# Altium PCB isokey_left.PcbDoc (part 2 of 5)
Units mm, origin at the board's own origin, x right, y up, seen from the top; angles counter-clockwise.
Board outline 154.06 x 134.15 mm, 2 copper layers (Top Layer, Bottom Layer), stack 1.569 mm thick; 140 components, 88 nets, 412 pads, 257 vias.
Unrouted connection lines stored in the file: 18.
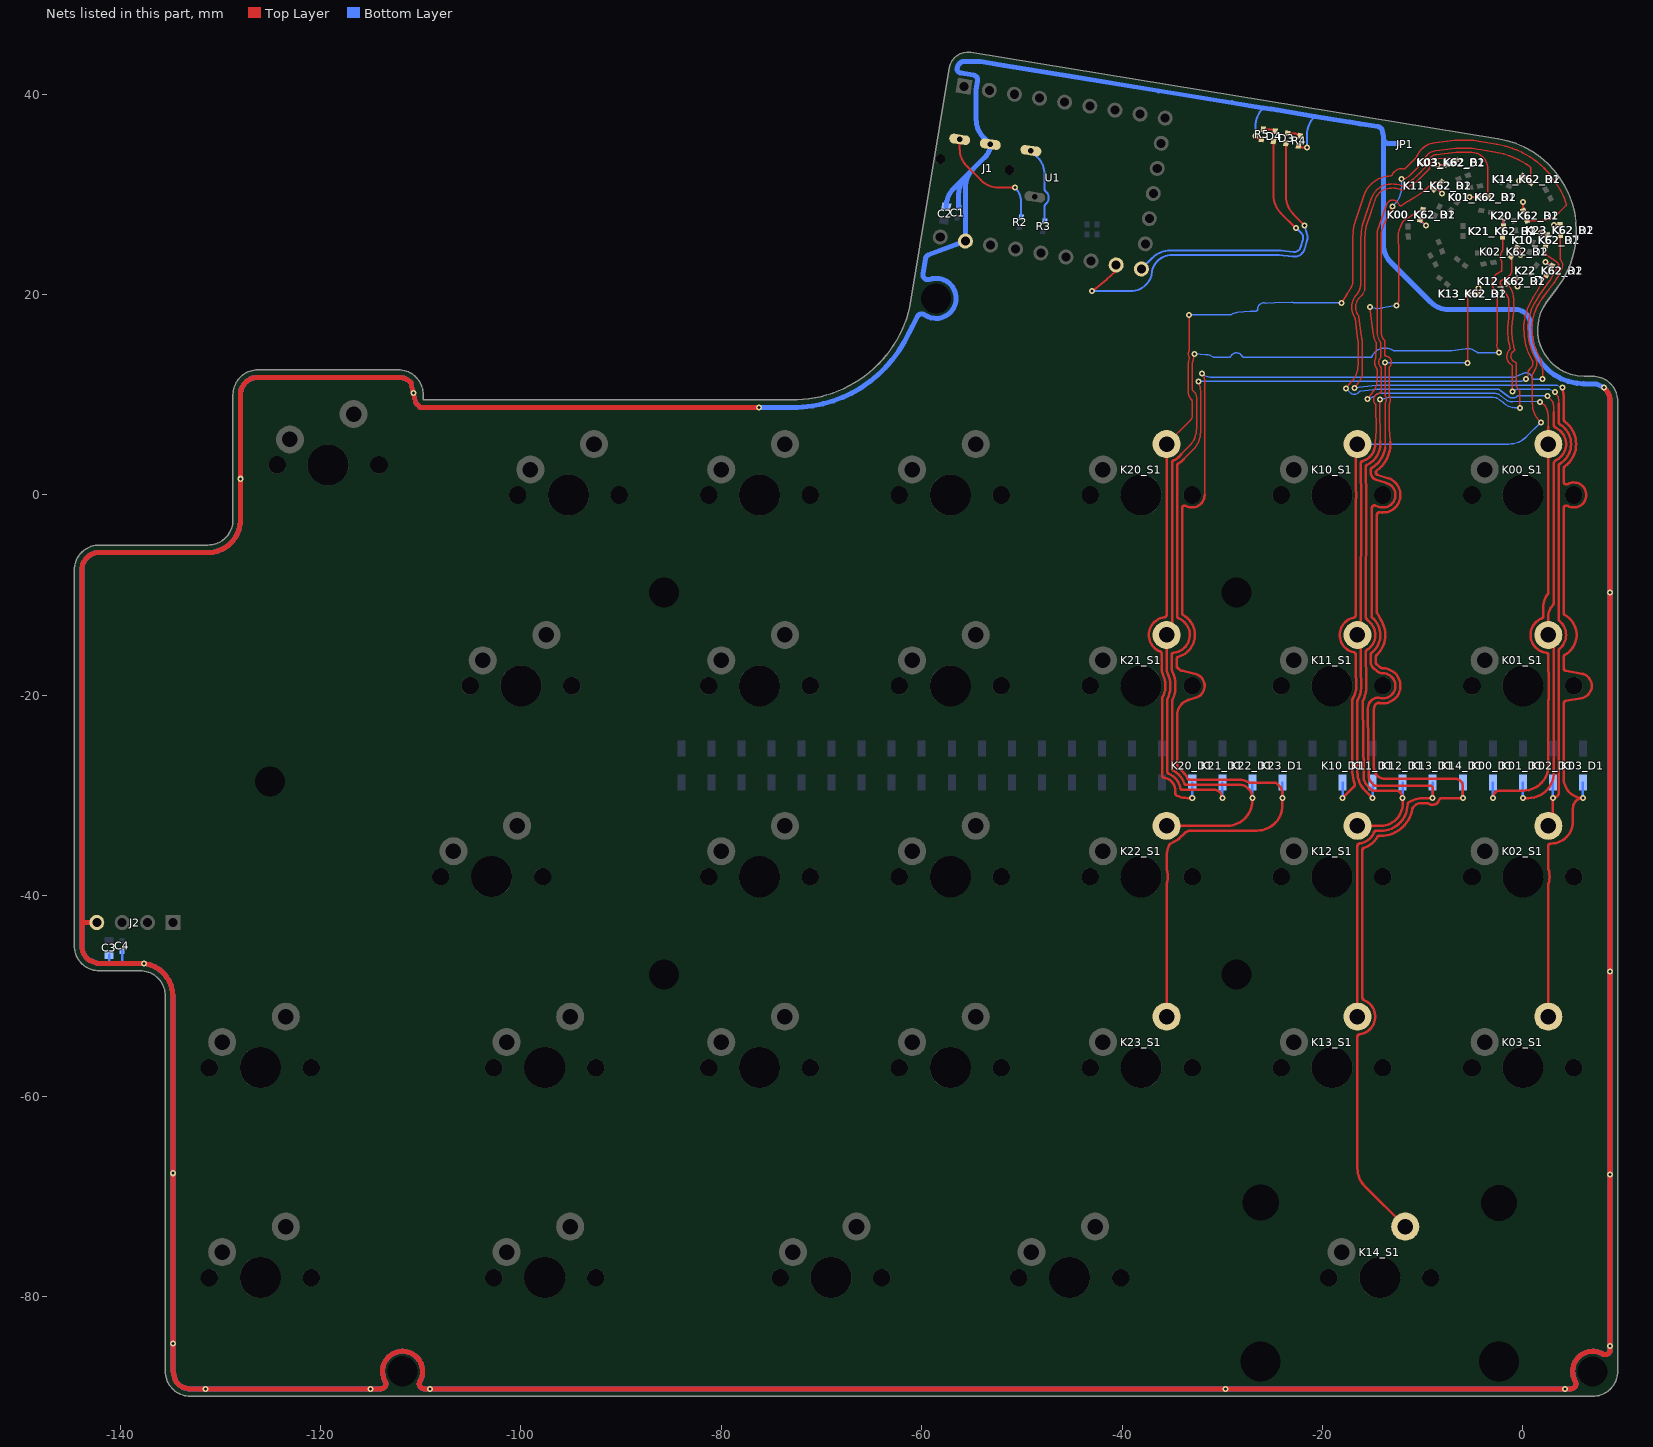
[diagram p2: the nets of this part, all layers, seen from the top]

## Via types
v1: diameter 0.6, hole 0.3, Top Layer to Bottom Layer, 257 vias

## Nets (pads, with @x,y where several pads share a name; then routed paths per layer and width w, separated by ;. In a path a pad name is that pad's centre, name@x,y a point inside that pad or via, vN(x,y) a via of type N, cw(c..) or ccw(c..) an arc to the next point about the centre after c; other vN are vias at no path point) (continued)
GND: C1.1 C2.1 C3.1 C4.1 J1.3 J2.4 JP1.2 R4.1 R5.1 U1.21 | length 1011
  Top Layer w0.2: v1(-26.701,35.827) -26.594,35.72 ccw(c-26.078,36.236) R5.1@-26.078,35.506 ; R4.1@-22.393,34.855 ccw(c-22.024,35.224) -22.024,34.702 v1(-21.551,34.702)
  Top Layer w0.5: -143.838,-42.7 cw(c-143.768,-42.77) -143.768,-42.671 J2.4@-142.339,-42.671 ; v1(-76.259,8.75) -110.061,8.75 -110.5,9.189 -110.997,11.207 -111.178,11.388 -111.381,11.523 ccw(c-111.658,11.108) -111.467,11.57 -111.695,11.664 ccw(c-111.886,11.202) -111.788,11.692 -112.03,11.74 ccw(c-112.127,11.25) -112.127,11.75 -112.25,11.75 -124.499,11.746 -126.368,11.745 ccw(c-126.368,11.245) -126.466,11.735 -126.707,11.687 ccw(c-126.609,11.197) -126.801,11.659 -127.028,11.565 ccw(c-126.837,11.103) -127.115,11.518 -127.319,11.382 ccw(c-127.042,10.966) -127.394,11.32 -127.57,11.144 ccw(c-127.216,10.792) -127.631,11.07 -127.796,10.824 -127.909,10.551 ccw(c-127.447,10.36) -127.937,10.457 -127.988,10.202 ccw(c-127.497,10.105) -127.997,10.116 -128,9.991 ccw(c-127.5,9.982) -128,9.983 -127.996,-1.215 -127.996,-2.46 cw(c-128.496,-2.46) -127.997,-2.488 -128.013,-2.787 cw(c-128.762,-2.745) -128.026,-2.891 -128.122,-3.372 cw(c-128.858,-3.226) -128.165,-3.513 -128.352,-3.965 cw(c-129.045,-3.678) -128.422,-4.095 -128.694,-4.503 cw(c-129.317,-4.086) -128.788,-4.617 -129.133,-4.962 cw(c-129.664,-4.433) -129.247,-5.056 -129.655,-5.328 cw(c-130.072,-4.705) -129.785,-5.398 -130.237,-5.585 cw(c-130.524,-4.892) -130.378,-5.628 -130.859,-5.724 cw(c-131.005,-4.988) -130.968,-5.737 -131.213,-5.749 cw(c-131.25,-5) -131.25,-5.75 -134.028,-5.75 -142.211,-5.75 ccw(c-142.211,-6.25) -142.308,-5.759 -142.55,-5.808 ccw(c-142.452,-6.298) -142.644,-5.836 -142.871,-5.93 ccw(c-142.68,-6.392) -142.958,-5.977 -143.163,-6.113 ccw(c-142.885,-6.529) -143.237,-6.175 -143.413,-6.351 ccw(c-143.059,-6.703) -143.474,-6.425 -143.612,-6.631 ccw(c-143.196,-6.908) -143.657,-6.715 -143.752,-6.944 ccw(c-143.29,-7.135) -143.78,-7.038 -143.838,-7.328 -143.838,-40.2 -143.838,-45.114 ccw(c-143.338,-45.114) -143.828,-45.211 -143.78,-45.453 ccw(c-143.29,-45.355) -143.752,-45.546 -143.657,-45.775 ccw(c-143.196,-45.583) -143.613,-45.858 -143.474,-46.066 ccw(c-143.059,-45.787) -143.414,-46.14 -143.237,-46.316 ccw(c-142.885,-45.961) -143.164,-46.376 -143.101,-46.418 ccw(c-142.824,-46.002) -143.007,-46.467 -142.363,-46.72 -142.26,-46.74 -138,-46.74 cw(c-138,-47.49) -137.963,-46.741 -137.718,-46.753 cw(c-137.755,-47.502) v1(-137.609,-46.767) -137.128,-46.863 cw(c-137.274,-47.598) -136.987,-46.905 -136.534,-47.093 cw(c-136.821,-47.786) -136.405,-47.162 -135.997,-47.434 cw(c-136.414,-48.058) -135.883,-47.529 -135.538,-47.873 cw(c-136.067,-48.404) -135.444,-47.988 -135.172,-48.395 cw(c-135.795,-48.812) -135.102,-48.525 -134.915,-48.978 cw(c-135.608,-49.265) -134.872,-49.118 -134.864,-49.157 -134.776,-49.599 cw(c-135.512,-49.745) -134.763,-49.709 -134.751,-49.954 cw(c-135.5,-49.99) -134.75,-49.99 -134.75,-61.8 -134.75,-87.298 cw(c-135.25,-87.298) -134.75,-87.3 ccw(c-134.25,-87.298) -134.733,-87.427 -134.47,-88.412 -134.386,-88.538 ccw(c-133.971,-88.259) -134.325,-88.612 -134.15,-88.788 ccw(c-133.797,-88.433) -134.076,-88.848 -133.869,-88.986 ccw(c-133.592,-88.57) -133.784,-89.032 -133.555,-89.127 ccw(c-133.365,-88.664) -133.463,-89.155 -133.221,-89.203 ccw(c-133.123,-88.712) -133.123,-89.212 -113.983,-89.212 ccw(c-113.984,-88.712) -113.551,-88.463 cw(c-111.819,-87.462) -110.088,-88.464 ccw(c-109.654,-88.712) -109.656,-89.212 4.806,-89.212 ccw(c4.804,-88.712) 5.238,-88.464 cw(c6.969,-87.462) 5.025,-87.93 cw(c6.969,-87.462) 7.971,-85.731 ccw(c8.219,-85.297) 8.719,-85.299 8.719,9.473 ccw(c8.219,9.473) 8.71,9.571 8.662,9.812 ccw(c8.171,9.715) 8.633,9.906 8.539,10.133 ccw(c8.077,9.942) 8.493,10.22 8.356,10.425 ccw(c7.94,10.147) 8.294,10.5 v1(8.085,10.709) v1@8.044,10.737
  Bottom Layer w0.2: v1(-26.701,35.827) -26.701,36.79 cw(c-24.161,36.79) -25.957,38.586 -25.907,38.636 ; v1(-21.551,34.702) -21.551,35.948 cw(c-19.011,35.948) -20.807,37.744 -20.756,37.795
  Bottom Layer w0.25: -141.1,-46.74 C3.1@-141.1,-45.911 ; -139.799,-46.74 C4.1@-139.799,-45.5
  Bottom Layer w0.5: -143.838,-42.7 cw(c-143.768,-42.77) -143.768,-42.671 J2.4@-142.339,-42.671 ; -65.72,10.934 cw(c-66.012,11.34) -65.734,10.924 -65.972,10.766 ; -65.189,11.316 ccw(c-65.627,11.925) -65.15,11.346 ; -63.601,12.738 cw(c-64.166,13.231) -63.644,12.693 -64.348,12.01 cw(c-64.87,12.548) -64.393,11.969 -64.819,11.618 -65.15,11.346 ; -63.601,12.738 -63.368,13.005 -62.956,13.476 ccw(c-63.521,13.969) -62.918,13.524 -62.335,14.312 ccw(c-62.938,14.758) -62.3,14.363 -61.883,15.035 -61.783,15.196 ccw(c-62.421,15.592) -61.753,15.25 -61.306,16.123 -60.961,16.798 -60.446,17.803 cw(c-60.001,17.575) -59.716,17.986 ccw(c-58.572,19.627) -59.222,21.518 cw(c-59.383,21.991) -59.876,22.074 -59.626,23.586 cw(c-59.133,23.504) -59.308,23.973 U1.21@-55.644,25.341 -55.644,30.702 cw(c-53.104,30.702) -54.9,32.498 ; C2.1@-57.555,28.784 -57.555,28.79 cw(c-55.015,28.79) -56.811,30.587 -55.563,31.835 ; C1.1@-56.307,28.661 -56.307,30.039 cw(c-53.767,30.039) -55.563,31.835 ; -17.276,37.227 -16.414,37.086 ; -16.205,37.052 -16.414,37.086 ; JP1.2@-12.293,35.086 -13.419,35.086 cw(c-13.419,35.577) -13.91,35.577 ; 1.452,13.783 1.145,14.396 cw(c1.816,14.732) 1.103,14.499 0.89,15.15 cw(c1.602,15.384) 0.863,15.258 0.789,15.69 0.748,15.935 cw(c1.487,16.06) 0.738,16.044 0.723,16.729 cw(c1.473,16.745) 0.729,16.841 0.751,17.017 ccw(c-0.742,17.017) -0.742,18.51 -7.421,18.51 cw(c-7.421,21.05) -9.217,19.254 -13.166,23.203 cw(c-11.37,24.999) -13.91,24.999 -13.91,35.577 ; 1.452,13.783 ccw(c2.122,14.119) 1.508,13.688 1.6,13.558 1.902,13.127 ccw(c2.516,13.557) 1.972,13.041 2.444,12.544 ccw(c2.988,13.06) 2.526,12.469 3.066,12.047 ccw(c3.528,12.637) 3.157,11.985 3.754,11.646 ccw(c4.124,12.298) 3.854,11.599 4.493,11.352 ccw(c4.764,12.051) 4.599,11.319 5.268,11.169 ; 5.331,11.157 cw(c5.433,11.901) 5.268,11.169 ; 6.284,11.099 ccw(c6.25,10.6) 6.25,11.1 6.116,11.1 cw(c6.116,11.85) 6.061,11.102 5.377,11.153 cw(c5.433,11.901) 5.268,11.169 ; 6.284,11.1 7.292,11.064 cw(c7.274,10.564) 7.372,11.054 7.438,11.041 v1@7.934,10.792 ; -65.972,10.766 -65.196,11.311 ccw(c-65.627,11.925) -65.15,11.346 ; -65.972,10.766 -66.198,10.615 -66.843,10.251 -67.007,10.163 cw(c-67.245,10.603) -67.021,10.155 cw(c-67.245,10.603) -67.035,10.149 -67.853,9.771 cw(c-68.167,10.453) -67.902,9.751 -68.819,9.404 cw(c-69.084,10.105) -68.877,9.385 -69.82,9.114 cw(c-70.027,9.834) -69.879,9.099 -70.841,8.906 cw(c-70.988,9.641) -70.901,8.896 -71.875,8.782 cw(c-71.963,9.527) -71.921,8.778 -72.411,8.751 cw(c-72.452,9.5) -72.452,8.75 v1(-76.259,8.75) -110.061,8.75 -110.5,9.189 -110.997,11.207 -111.178,11.388 -111.381,11.523 ccw(c-111.658,11.108) -111.467,11.57 -111.695,11.664 ccw(c-111.886,11.202) -111.788,11.692 -112.03,11.74 ccw(c-112.127,11.25) -112.127,11.75 -112.25,11.75 -124.499,11.746 -126.368,11.745 ccw(c-126.368,11.245) -126.466,11.735 -126.707,11.687 ccw(c-126.609,11.197) -126.801,11.659 -127.028,11.565 ccw(c-126.837,11.103) -127.115,11.518 -127.319,11.382 ccw(c-127.042,10.966) -127.394,11.32 -127.57,11.144 ccw(c-127.216,10.792) -127.631,11.07 -127.796,10.824 -127.909,10.551 ccw(c-127.447,10.36) -127.937,10.457 -127.988,10.202 ccw(c-127.497,10.105) -127.997,10.116 -128,9.991 ccw(c-127.5,9.982) -128,9.983 -127.996,-1.215 -127.996,-2.46 cw(c-128.496,-2.46) -127.997,-2.488 -128.013,-2.787 cw(c-128.762,-2.745) -128.026,-2.891 -128.122,-3.372 cw(c-128.858,-3.226) -128.165,-3.513 -128.352,-3.965 cw(c-129.045,-3.678) -128.422,-4.095 -128.694,-4.503 cw(c-129.317,-4.086) -128.788,-4.617 -129.133,-4.962 cw(c-129.664,-4.433) -129.247,-5.056 -129.655,-5.328 cw(c-130.072,-4.705) -129.785,-5.398 -130.237,-5.585 cw(c-130.524,-4.892) -130.378,-5.628 -130.859,-5.724 cw(c-131.005,-4.988) -130.968,-5.737 -131.213,-5.749 cw(c-131.25,-5) -131.25,-5.75 -134.028,-5.75 -142.211,-5.75 ccw(c-142.211,-6.25) -142.308,-5.759 -142.55,-5.808 ccw(c-142.452,-6.298) -142.644,-5.836 -142.871,-5.93 ccw(c-142.68,-6.392) -142.958,-5.977 -143.163,-6.113 ccw(c-142.885,-6.529) -143.237,-6.175 -143.413,-6.351 ccw(c-143.059,-6.703) -143.474,-6.425 -143.612,-6.631 ccw(c-143.196,-6.908) -143.657,-6.715 -143.752,-6.944 ccw(c-143.29,-7.135) -143.78,-7.038 -143.838,-7.328 -143.838,-40.2 -143.838,-45.114 ccw(c-143.338,-45.114) -143.828,-45.211 -143.78,-45.453 ccw(c-143.29,-45.355) -143.752,-45.546 -143.657,-45.775 ccw(c-143.196,-45.583) -143.613,-45.858 -143.474,-46.066 ccw(c-143.059,-45.787) -143.414,-46.14 -143.237,-46.316 ccw(c-142.885,-45.961) -143.164,-46.376 -143.101,-46.418 ccw(c-142.824,-46.002) -143.007,-46.467 -142.363,-46.72 -142.26,-46.74 -141.1,-46.74 -139.799,-46.74 -138,-46.74 cw(c-138,-47.49) -137.963,-46.741 -137.718,-46.753 cw(c-137.755,-47.502) v1(-137.609,-46.767) -137.128,-46.863 cw(c-137.274,-47.598) -136.987,-46.905 -136.534,-47.093 cw(c-136.821,-47.786) -136.405,-47.162 -135.997,-47.434 cw(c-136.414,-48.058) -135.883,-47.529 -135.538,-47.873 cw(c-136.067,-48.404) -135.444,-47.988 -135.172,-48.395 cw(c-135.795,-48.812) -135.102,-48.525 -134.915,-48.978 cw(c-135.608,-49.265) -134.872,-49.118 -134.864,-49.157 -134.776,-49.599 cw(c-135.512,-49.745) -134.763,-49.709 -134.751,-49.954 cw(c-135.5,-49.99) -134.75,-49.99 -134.75,-61.8 -134.75,-87.298 cw(c-135.25,-87.298) -134.75,-87.3 ccw(c-134.25,-87.298) -134.733,-87.427 -134.47,-88.412 -134.386,-88.538 ccw(c-133.971,-88.259) -134.325,-88.612 -134.15,-88.788 ccw(c-133.797,-88.433) -134.076,-88.848 -133.869,-88.986 ccw(c-133.592,-88.57) -133.784,-89.032 -133.555,-89.127 ccw(c-133.365,-88.664) -133.463,-89.155 -133.221,-89.203 ccw(c-133.123,-88.712) -133.123,-89.212 -113.983,-89.212 ccw(c-113.984,-88.712) -113.551,-88.463 cw(c-111.819,-87.462) -110.088,-88.464 ccw(c-109.654,-88.712) -109.656,-89.212 4.806,-89.212 ccw(c4.804,-88.712) 5.238,-88.464 cw(c6.969,-87.462) 5.025,-87.93 cw(c6.969,-87.462) 7.971,-85.731 ccw(c8.219,-85.297) 8.719,-85.299 8.719,9.473 ccw(c8.219,9.473) 8.71,9.571 8.662,9.812 ccw(c8.171,9.715) 8.633,9.906 8.539,10.133 ccw(c8.077,9.942) 8.493,10.22 8.356,10.425 ccw(c7.94,10.147) 8.294,10.5 v1(8.085,10.709) v1@8.044,10.737 ; -55.563,31.835 -54.9,32.498 ; -54.9,32.498 -53.698,33.699 ccw(c-55.01,35.011) J1.3@-53.155,35.011 -53.822,35.679 cw(c-52.026,37.475) -54.566,37.475 -54.566,40.394 -54.417,41.336 ccw(c-54.91,41.415) -54.832,41.908 -56.051,42.101 cw(c-55.971,42.595) -56.177,42.139 -56.212,42.155 cw(c-56.006,42.611) -56.496,42.512 -56.452,42.68 cw(c-55.969,42.55) -56.417,42.771 -56.366,42.875 cw(c-55.917,42.654) -56.314,42.959 -56.243,43.051 cw(c-55.847,42.747) -56.176,43.122 -56.173,43.125 cw(c-55.843,42.75) -55.843,43.25 -54.195,43.25 cw(c-54.195,42.75) -54.114,43.243 -51.78,42.862 -45.322,41.807 -36.366,40.345 -29.054,39.15 -25.948,38.643 -25.907,38.636 -25.189,38.519 -25.091,38.503 -24.504,38.407 -20.756,37.795 -16.414,37.086 ; -16.414,37.086 -14.452,36.765 cw(c-14.532,36.272) -14.062,36.443 cw(c-16.45,35.577) -13.91,35.577 ; v1@7.934,10.792 cw(c7.766,10.321) v1@8.044,10.737 ; v1@7.934,10.792 v1@8.044,10.737
  other v1: -131.475,-89.212 -115.004,-89.212 -109.063,-89.212 -29.659,-89.212 4.201,-89.212 8.719,-84.928 -134.75,-84.681 8.719,-67.825 -134.75,-67.697 8.719,-47.577 8.719,-9.723 -127.997,1.62 -110.749,10.198
LED0: D3.2 U1.15 | length 38.4
  Top Layer w0.2: v1(-42.99,20.34) -41.535,21.507 ccw(c-41.66,21.663) -41.522,21.519 -41.145,21.879 -40.653,22.349 ccw(c-40.791,22.494) -40.591,22.494 U1.15@-40.591,22.957 ; D3.2@-23.643,35.105 -23.643,29.813 ccw(c-21.103,29.813) -22.899,28.017 v1(-21.803,26.921)
  Bottom Layer w0.2: v1(-42.99,20.34) -39.162,20.34 ccw(c-39.162,22.518) -37.079,21.879 -36.997,22.383 ccw(c-38.083,22.56) -36.997,22.386 -36.973,22.527 cw(c-36.776,22.495) -36.966,22.559 cw(c-34.988,21.879) -34.988,23.97 -24.381,23.97 cw(c-24.381,23.77) -24.356,23.969 -22.963,23.797 ccw(c-22.828,24.889) -22.154,24.02 ccw(c-22.828,24.889) -21.804,24.488 ccw(c-22.222,24.655) -21.803,24.491 ccw(c-22.828,24.889) -21.774,24.575 ; v1(-21.803,26.921) -21.533,26.026 cw(c-22.585,25.706) -21.531,25.393 ; -21.774,24.575 -21.531,25.392
LED1: D4.2 U1.14 | length 28.5
  Top Layer w0.2: D4.2@-24.893,35.318 -24.893,29.929 ccw(c-22.353,29.929) -24.149,28.133 v1(-22.666,26.65)
  Bottom Layer w0.2: U1.14@-38.083,22.56 -36.966,23.676 cw(c-35.17,21.88) -35.17,24.42 -24.191,24.42 cw(c-24.191,24.22) -24.163,24.418 -22.918,24.245 ccw(c-22.828,24.889) -22.222,24.654 ; v1(-22.666,26.65) -22.154,26.192 cw(c-22.585,25.706) -21.941,25.795 cw(c-22.585,25.706) -21.962,25.521 -22.205,24.704 cw(c-22.828,24.889) -22.222,24.655
NetD3_1: D3.1 R4.2 | length 1.3
  Top Layer w0.2: D3.1@-23.486,36.092 -22.84,36.092 cw(c-22.84,35.239) R4.2@-22.236,35.842
NetD4_1: D4.1 R5.2 | length 1.2
  Top Layer w0.2: R5.2@-25.922,36.494 -25.191,36.494 cw(c-25.191,35.851) D4.1@-24.736,36.306
NetJ1_2: J1.2 R2.2 | length 11.6
  Top Layer w0.2: J1.2@-56.216,35.496 -56.216,34.584 ccw(c-53.676,34.584) -55.473,32.788 -54.13,31.446 ccw(c-52.334,33.242) -52.334,30.702 v1(-50.688,30.702)
  Bottom Layer w0.2: v1(-50.688,30.702) cw(c-52.174,29.216) -50.072,29.216 R2.2@-50.072,27.717
NetJ1_4: J1.4 R3.2 | length 7.8
  Bottom Layer w0.2: J1.4@-49.105,34.37 -48.47,33.735 cw(c-50.266,31.939) -47.726,31.939 -47.726,30.488 ccw(c-47.526,30.489) -47.651,30.333 cw(c-48.179,29.667) -47.651,29.001 ccw(c-47.526,28.845) -47.726,28.846 R3.2@-47.726,27.315
NetK00_D1_2: K00_D1.2 K00_K62_D2.2 K00_S1.2 | length 87.8
  Top Layer w0.15: v1(-15.502,9.574) -15.145,10.062 cw(c-15.024,9.973) -15.143,10.065 -15.08,10.146 cw(c-14.27,9.517) -14.97,10.266 ccw(c-16.335,11.401) -14.56,11.401 -14.56,11.758 ; v1(-15.268,18.742) -14.946,16.046 ccw(c-12.943,16.285) -14.657,15.221 cw(c-14.784,15.142) -14.634,15.14 ; -14.634,15.139 -14.662,13.764 cw(c-14.812,13.767) -14.678,13.7 ccw(c-13.76,13.244) -14.589,12.641 cw(c-14.71,12.553) -14.56,12.553 -14.56,11.761 ; v1(-12.636,18.935) -12.437,19.226 ccw(c-12.561,19.311) -12.411,19.311 -12.411,23.96 -12.42,26.08 cw(c-11.695,26.084) -12.366,26.359 -12.319,26.475 -12.019,27.207 cw(c-11.719,27.084) -11.902,27.352 -10.774,28.123 cw(c-10.689,28) -10.727,28.145 -10.21,28.278 K00_K62_D2.2@-9.983,28.45 ; v1(1.728,9.292) 2.167,8.971 cw(c2.078,8.85) 2.208,8.925 cw(c0,7.669) 2.209,8.923 cw(c0,7.669) 2.54,7.669 2.54,6.799
  Top Layer w0.25: v1(-3,-30.25) cw(c-2.25,-30.25) -2.25,-29.5 0.071,-29.5 ccw(c0.071,-27.031) 2.54,-27.031 2.54,-20.504 cw(c2.79,-20.505) 2.563,-20.401 ccw(c2.335,-20.298) 2.585,-20.298 2.585,-17.802 ccw(c2.335,-17.802) 2.563,-17.699 cw(c2.79,-17.595) 2.54,-17.596 2.54,-15.978 ccw(c2.29,-15.98) 2.321,-15.731 cw(c2.54,-13.97) 1.883,-12.321 1.884,-12.321 ccw(c1.79,-12.089) 2.04,-12.09 2.04,-11.26 cw(c4.403,-11.26) 2.492,-9.87 ccw(c2.29,-9.723) 2.54,-9.723 K00_S1.2@2.54,5.08 2.54,6.799
  Bottom Layer w0.15: v1(-15.502,9.574) -14.954,9.808 ccw(c-15.014,9.946) -14.929,9.822 -14.625,10.032 cw(c-14.27,9.517) -14.27,10.142 -2.942,10.142 cw(c-2.942,8.664) -2.417,10.046 cw(c-2.471,9.906) -2.382,10.027 -1.766,9.579 -1.642,9.488 ccw(c-1.407,9.812) -1.641,9.488 ccw(c-1.039,10.317) -1.375,9.349 ccw(c-1.039,10.317) -1.017,9.292 1.587,9.349 cw(c1.59,9.199) 1.59,9.349 cw(c1.59,9.155) v1(1.728,9.292) ; v1(-15.268,18.742) -14.736,18.621 ccw(c-14.614,19.158) -14.541,18.613 ccw(c-14.594,19.009) -14.539,18.613 cw(c-13.76,13.244) -14.054,18.661 ccw(c-14.074,19.061) -14.052,18.661 ccw(c-14.074,19.061) -14.046,18.662 ccw(c-14.084,19.21) -13.977,18.671 v1(-12.636,18.935)
  Bottom Layer w0.25: v1(-3,-30.25) K00_D1.2@-3,-28.7
NetK00_K62_D2_1: K00_K62_D2.1 K00_K62_R1.2 | length 1.6
  Top Layer w0.15: K00_K62_D2.1@-10.242,27.485 v1(-9.679,26.921)
  Bottom Layer w0.15: K00_K62_R1.2@-10.242,27.485 -10.131,27.222 v1(-9.679,26.921)
NetK01_D1_2: K01_D1.2 K01_K62_D2.2 K01_S1.2 | length 107.7
  Top Layer w0.15: v1(-17.675,10.619) -17.317,11.07 cw(c-16.827,10.681) -17.244,11.147 -17.205,11.183 ccw(c-17.305,11.294) -17.198,11.189 ccw(c-18.994,12.985) -16.454,12.985 -16.454,13.342 ; -16.534,15.85 ccw(c-12.943,16.285) -16.533,15.847 -16.455,15.206 cw(c-16.604,15.188) -16.454,15.188 -16.454,13.345 ; -16.534,15.851 -16.755,17.653 ccw(c-16.904,17.635) -16.779,17.718 cw(c-15.268,18.742) -16.794,19.743 cw(c-15.268,18.742) -16.546,20.045 ccw(c-16.652,20.151) -16.528,20.067 ccw(c-18.322,21.271) -16.161,21.271 -16.161,25.271 -16.16,25.767 ; -16.16,25.768 cw(c-11.62,25.758) -16.145,26.122 cw(c-11.62,25.758) -16.133,26.257 cw(c-11.62,25.758) -15.928,27.192 -15.132,29.582 cw(c-13.112,28.91) -15.129,29.589 ; -10.564,31.882 -10.927,31.532 cw(c-11.031,31.639) -10.953,31.512 -11.981,30.876 cw(c-12.06,31.003) -12.118,30.865 ccw(c-12.99,28.818) -13.07,31.041 -13.182,31.037 ccw(c-13.112,28.91) -13.435,31.014 ; -10.563,31.883 -10.352,32.087 ccw(c-10.456,32.195) -10.351,32.088 -9.76,32.679 -9.465,33.358 cw(c-8.524,32.951) -8.641,33.969 -6.639,34.199 cw(c-6.621,34.05) -6.621,34.2 -5.129,34.2 -4.622,34.117 cw(c-4.647,33.969) -4.598,34.111 cw(c-5.129,32.57) -3.499,32.57 K01_K62_D2.2@-3.499,29.726 ; v1(2.453,9.899) 2.849,9.467 cw(c2.739,9.366) 2.858,9.457 cw(c2.045,8.836) 2.859,9.456 cw(c2.045,8.836) 3.068,8.836 3.068,8.258 ; -15.129,29.589 cw(c-13.112,28.91) -13.435,31.014 ; -15.129,29.589 cw(c-13.112,28.91) -13.435,31.014 ; -15.129,29.589 cw(c-13.112,28.91) -13.435,31.014
  Top Layer w0.25: v1(0,-30.25) 0.546,-30.25 ccw(c0.546,-27.71) 3.086,-27.71 3.086,-22.754 ccw(c2.836,-22.754) 3.086,-22.753 cw(c3.586,-22.75) 3.086,-22.75 3.086,-16.469 cw(c3.586,-16.469) 3.086,-16.466 K01_S1.2@3.086,-13.97 ; K01_S1.2@2.54,-13.97 2.54,-12.111 cw(c4.111,-12.111) 3,-11 ccw(c2.793,-10.793) 3.086,-10.793 3.086,3.219 3.197,3.387 3.268,3.447 3.377,3.515 ccw(c2.54,5.08) 3.377,6.645 3.267,6.713 3.196,6.773 3.086,6.939 3.068,8.258
  Bottom Layer w0.15: v1(-17.675,10.619) -17.255,10.225 ccw(c-16.827,10.681) -16.338,10.292 cw(c-16.222,10.198) -16.238,10.347 -14.568,10.541 cw(c-14.551,10.392) -14.551,10.542 -13.761,10.542 ; -13.76,10.542 -2.358,10.542 -2.226,10.41 ccw(c-2.12,10.516) -2.208,10.395 -1.407,9.812 ccw(c-1.039,10.317) -0.842,9.724 -0.691,9.774 cw(c-0.345,9.428) -0.345,9.917 1.853,9.917 cw(c1.853,9.767) 1.857,9.917 v1(2.453,9.899)
  Bottom Layer w0.25: v1(0,-30.25) K01_D1.2@0,-28.7
NetK01_K62_D2_1: K01_K62_D2.1 K01_K62_R1.2 | length 1.6
  Top Layer w0.15: v1(-5.315,29.726) K01_K62_D2.1@-4.499,29.726
  Bottom Layer w0.15: v1(-5.315,29.726) K01_K62_R1.2@-4.499,29.726
NetK02_D1_2: K02_D1.2 K02_K62_D2.2 K02_S1.2 | length 65.6
  Top Layer w0.15: -1.973,20.566 -1.475,19.721 cw(c-1.604,19.645) -1.46,19.686 cw(c-3.384,19.154) -1.388,19.154 -1.388,17.859 cw(c-1.538,17.859) -1.389,17.841 -1.478,17.12 ccw(c-1.082,17.07) -1.479,17.119 ; -1.973,20.567 -2.223,21 cw(c-1.942,21.162) -2.251,21.063 cw(c-1.942,21.162) -2.104,21.444 -2.099,21.447 -1.844,21.594 -1.583,21.745 -1.54,21.769 ccw(c-1.74,22.116) -1.528,21.776 -1.382,21.867 ccw(c-1.671,22.335) -1.121,22.335 -1.121,23.287 ccw(c-1.521,23.287) -1.122,23.318 -1.14,23.568 K02_K62_D2.2@-1.161,23.851 ; -1.501,16.682 -1.487,15.997 ; -1.501,16.684 cw(c0.898,16.733) -1.502,16.688 cw(c1.473,16.745) -1.479,17.115 cw(c0.506,16.868) -1.479,17.116 ; -1.487,15.993 ccw(c1.487,16.06) -1.446,15.565 ccw(c0.132,15.829) -1.446,15.563 ccw(c-0.657,15.694) -1.446,15.561 -1.388,15.223 ccw(c-0.994,15.289) -1.388,15.222 -1.33,14.884 ccw(c-0.936,14.951) -1.33,14.883 ; -1.329,14.879 ccw(c1.602,15.384) -1.286,14.673 cw(c-1.432,14.637) -1.322,14.536 ccw(c-0.572,13.836) -1.152,12.991 -1.117,12.967 cw(c-1.202,12.843) -1.052,12.844 -1.052,10.349 ccw(c-1.007,10.349) v1(-1.039,10.317) ; v1(3.203,10.299) 3.51,9.829 cw(c3.384,9.747) 3.531,9.78 cw(c2.463,9.544) 3.531,9.778 cw(c2.463,9.544) 3.556,9.544 3.556,9.113
  Top Layer w0.25: K02_S1.2@2.784,-33.02 ccw(c2.262,-32.498) 3,-32.498 v1(3,-30.25) ccw(c3,-29.664) 3.586,-29.664 3.586,-22.75 3.586,-15.525 cw(c3.836,-15.526) 3.675,-15.335 ccw(c2.54,-13.97) 3.675,-12.605 cw(c3.836,-12.414) 3.586,-12.415 3.586,2.914 cw(c3.836,2.913) 3.707,3.127 ccw(c2.54,5.08) 3.706,7.033 cw(c3.836,7.247) 3.586,7.246 3.586,8.248 ; 3.556,9.113 3.571,8.682 ; 3.571,8.681 3.585,8.249
  Bottom Layer w0.15: v1(-1.039,10.317) cw(c-0.496,9.774) -0.496,10.542 2.627,10.542 cw(c2.627,10.392) 2.688,10.529 v1(3.203,10.299)
  Bottom Layer w0.25: v1(3,-30.25) K02_D1.2@3,-28.7
NetK02_K62_D2_1: K02_K62_D2.1 K02_K62_R1.2 | length 1.8
  Top Layer w0.15: K02_K62_D2.1@-0.609,24.685 -0.269,24.345 -0.269,23.992 v1(-0.237,23.96)
  Bottom Layer w0.15: K02_K62_R1.2@-0.613,24.684 -0.272,24.343 -0.272,23.995 v1(-0.237,23.96)
NetK03_D1_2: K03_D1.2 K03_K62_D2.2 K03_S1.2 | length 127.2
  Top Layer w0.15: v1(-16.827,10.681) -16.798,10.711 ccw(c-16.904,10.816) -16.783,10.728 -16.16,11.58 ccw(c-16.604,11.905) -16.054,11.901 ccw(c-16.454,11.904) -16.054,11.904 -16.054,14.722 -16.054,15.447 ccw(c-16.204,15.447) -16.059,15.484 cw(c-12.943,16.285) -16.137,15.899 ; -16.137,15.9 -16.369,17.801 ccw(c-16.518,17.783) -16.399,17.874 cw(c-15.268,18.742) -16.11,19.891 -16.09,19.91 ccw(c-16.462,20.315) -15.959,20.093 -15.808,20.435 ccw(c-16.311,20.657) -15.761,20.654 ccw(c-16.161,20.656) -15.761,20.656 -15.761,25.27 -15.76,25.766 ; -15.76,25.767 cw(c-11.62,25.758) -15.735,26.209 cw(c-11.62,25.758) -15.522,27.142 ; -15.521,27.144 -15.218,27.999 -14.759,29.435 cw(c-13.112,28.91) -13.112,30.638 cw(c-12.99,28.818) -12.81,30.634 cw(c-12.99,28.818) -12.108,30.415 ccw(c-12.037,30.547) -11.958,30.419 -11.305,30.823 -10.705,31.195 ccw(c-10.784,31.322) -10.68,31.214 -10.286,31.594 ; -10.286,31.595 -10.071,31.803 -9.386,32.487 ccw(c-9.493,32.593) -9.353,32.538 -9.13,33.105 cw(c-8.524,32.951) -8.554,33.575 -7.439,33.656 cw(c-7.414,33.332) -7.363,33.653 -6.886,33.577 ccw(c-6.862,33.725) -6.862,33.575 cw(c-6.862,33.385) K03_K62_D2.2@-6.672,33.385
  Top Layer w0.25: K03_S1.2@2.54,-52.07 2.54,-38.919 cw(c2.79,-38.921) 2.552,-38.845 ccw(c0.244,-38.1) 2.552,-37.355 cw(c2.79,-37.279) 2.54,-37.281 2.54,-35.044 cw(c2.79,-35.045) 2.789,-34.795 ccw(c2.789,-32.584) 5,-32.584 5,-31.25 cw(c6,-31.25) v1(6,-30.25) cw(c6,-28.336) 4.086,-28.336 4.086,-20.801 cw(c4.336,-20.801) 4.292,-20.555 5.843,-20.281 ccw(c5.626,-19.05) 5.843,-17.819 4.292,-17.545 cw(c4.336,-17.299) 4.109,-17.404 ; v1(3.95,10.704) 4.082,9.946 cw(c3.836,9.904) 4.086,9.904 4.086,7.513 ccw(c4.336,7.514) 4.186,7.314 cw(c2.54,5.08) 4.187,2.846 ccw(c4.336,2.646) 4.086,2.647 4.086,1.301 ccw(c4.336,1.302) 4.459,1.085 cw(c5.08,0) 4.459,-1.085 ccw(c4.336,-1.302) 4.086,-1.301 4.086,-11.777 ccw(c4.336,-11.776) 4.211,-11.993 cw(c3.086,-13.97) 4.212,-15.947 ccw(c4.336,-16.164) 4.086,-16.163 4.086,-17.299 ccw(c4.336,-17.299) 4.108,-17.403
  Bottom Layer w0.15: v1(-16.827,10.681) -14.583,10.942 3.373,10.942 cw(c3.373,10.792) 3.433,10.93 v1(3.95,10.704)
  Bottom Layer w0.25: v1(6,-30.25) K03_D1.2@6,-28.7
NetK03_K62_D2_1: K03_K62_D2.1 K03_K62_R1.2 | length 1.9
  Top Layer w0.15: v1(-8.524,32.951) -8.519,32.956 -7.613,32.956 K03_K62_D2.1@-7.587,32.982
  Bottom Layer w0.15: v1(-8.524,32.951) -8.517,32.958 -7.605,32.958 K03_K62_R1.2@-7.577,32.986
NetK10_D1_2: K10_D1.2 K10_K62_D2.2 K10_S1.2 | length 77.8
  Top Layer w0.15: 0.513,16.038 ccw(c1.487,16.06) 0.526,15.897 0.599,15.471 0.641,15.219 ccw(c1.602,15.384) 0.676,15.081 ; 0.513,16.039 0.498,16.724 cw(c0.898,16.733) 0.498,16.726 cw(c1.473,16.745) 0.506,16.867 0.592,17.548 ; 0.592,17.549 cw(c1.559,17.425) 0.621,17.69 ; 0.621,17.69 0.806,18.349 ; 0.676,15.08 0.889,14.429 ccw(c1.269,14.553) 0.889,14.427 ccw(c1.816,14.732) 0.943,14.297 ccw(c1.301,14.475) 0.944,14.296 1.25,13.683 ccw(c1.608,13.861) 1.251,13.681 ccw(c2.122,14.119) 1.272,13.641 cw(c0.379,13.138) 1.277,12.644 0.966,12.079 ccw(c1.098,12.006) 0.948,12.006 0.948,9.155 ccw(c3.488,9.155) 1.692,7.358 v1(1.8,7.25) ; 0.807,18.351 cw(c1.745,18.085) 0.855,18.484 ; 0.855,18.484 1.136,19.109 ccw(c0.771,19.274) 1.136,19.111 ; 1.137,19.112 cw(c2.026,18.711) 1.205,19.237 1.231,19.278 1.574,19.814 cw(c2.395,19.289) 1.599,19.851 2.692,21.401 ccw(c2.427,21.588) 2.707,21.423 3.012,21.94 3.52,22.801 ccw(c3.241,22.966) 3.422,23.236 3.305,23.315 2.607,23.784 ccw(c2.256,23.267) 2.603,23.787 2.342,23.963 cw(c2.425,24.088) 2.275,24.088 K10_K62_D2.2@2.275,24.928
  Top Layer w0.25: v1(-18,-30.25) -16.844,-29.094 ccw(c-17.021,-28.918) -16.789,-28.825 cw(c-13.97,-27.688) -17.01,-27.688 -17.01,-20.431 cw(c-16.76,-20.433) -16.975,-20.304 ccw(c-19.05,-19.05) -16.676,-19.544 ccw(c-19.05,-19.05) -16.626,-18.968 -16.675,-17.516 cw(c-16.426,-17.508) -16.676,-17.508 -16.676,-15.952 ccw(c-16.926,-15.952) -16.874,-15.707 cw(c-16.51,-13.97) -16.874,-12.233 ccw(c-16.926,-11.988) -16.676,-11.988 -16.676,-0.516 cw(c-16.426,-0.518) -16.671,-0.47 ccw(c-19.05,0) -16.671,0.47 cw(c-16.426,0.518) -16.676,0.516 -16.676,4.68 cw(c-16.11,4.68) K10_S1.2@-16.51,5.08
  Bottom Layer w0.15: K10_S1.2@-16.51,5.08 -1.422,5.08 ccw(c-1.422,7.62) 0.374,5.824 v1(1.8,7.25)
  Bottom Layer w0.25: v1(-18,-30.25) K10_D1.2@-18,-28.7
NetK10_K62_D2_1: K10_K62_D2.1 K10_K62_R1.2 | length 1.4
  Top Layer w0.15: v1(1.748,26.125) ccw(c2.242,26.619) 2.242,25.92 K10_K62_D2.1@2.401,25.92
  Bottom Layer w0.15: v1(1.748,26.125) ccw(c2.242,26.619) 2.242,25.92 K10_K62_R1.2@2.401,25.92
NetK11_D1_2: K11_D1.2 K11_K62_D2.2 K11_S1.2 | length 69.9
  Top Layer w0.15: -14.875,9.675 ccw(c-14.73,9.638) -14.879,9.627 cw(c-15.502,9.574) -14.887,9.464 ccw(c-14.739,9.439) -14.887,9.415 ccw(c-14.27,9.517) -14.887,9.414 ccw(c-14.27,9.517) -14.712,9.075 cw(c-14.818,8.969) -14.668,8.971 -14.658,6.396 -14.735,5.256 ccw(c-14.585,5.246) -14.735,5.246 -14.735,5.08 ; -14.875,9.677 cw(c-14.27,9.517) -14.301,10.141 ccw(c-14.31,10.291) -14.16,10.29 -14.16,12.698 ; -14.203,15.221 -14.203,13.685 ccw(c-13.76,13.244) -14.22,12.821 -14.2,12.799 cw(c-14.31,12.697) -14.16,12.699 ; -14.204,15.222 ccw(c-14.353,15.22) -14.232,15.307 -14.257,15.342 cw(c-12.943,16.285) -14.56,16.285 -14.56,25.758 cw(c-11.62,25.758) -14.39,26.742 -13.579,29.027 cw(c-12.99,28.818) -12.463,29.153 -12.315,28.922 ccw(c-12.189,29.002) -12.094,28.886 cw(c-11.996,28.772) -12.092,28.888 cw(c-9.983,26.352) -11.712,29.16 ; -11.711,29.161 -11.139,29.514 ; -11.138,29.514 -9.964,30.242 ccw(c-10.043,30.369) -9.939,30.261 -9.453,30.731 -9.021,31.148 cw(c-8.795,30.914) -8.753,31.236 -8.402,31.19 K11_K62_D2.2@-8.118,31.221
  Top Layer w0.25: K11_S1.2@-16.51,-13.97 K11_S1.2@-16.176,-13.97 ; -16.175,-16.755 -16.158,-17.515 -16.126,-18.983 cw(c-19.05,-19.05) -16.166,-19.54 cw(c-19.05,-19.05) -16.186,-19.643 cw(c-19.05,-19.05) -16.48,-20.446 ccw(c-16.26,-20.565) -16.51,-20.565 -16.51,-27.688 ccw(c-13.97,-27.688) -15.766,-29.484 v1(-15,-30.25) ; -16.175,-16.755 cw(c-14.426,-16.716) -16.176,-16.716 K11_S1.2@-16.176,-13.97 ; -16.176,-12.257 K11_S1.2@-16.176,-13.97 ; -16.176,-12.257 -16.125,-0.015 ccw(c-19.05,0) -16.126,0.071 -16.175,2.198 cw(c-14.426,2.237) -16.176,2.232 -16.176,2.802 -16.175,3.142 cw(c-15.925,3.141) -15.998,3.381 ccw(c-16.51,5.08) -14.879,4.379 ccw(c-16.51,5.08) -14.735,5.08
  Bottom Layer w0.25: v1(-15,-30.25) K11_D1.2@-15,-28.7
NetK11_K62_D2_1: K11_K62_D2.1 K11_K62_R1.2 | length 1.9
  Top Layer w0.15: K11_K62_D2.1@-8.837,30.526 -8.554,30.556 v1(-8.071,30.093)
  Bottom Layer w0.15: K11_K62_R1.2@-8.837,30.526 -8.554,30.556 v1(-8.071,30.093)
NetK12_D1_2: K12_D1.2 K12_K62_D2.2 K12_S1.2 | length 79.3
  Top Layer w0.15: -14.254,5.371 -14.268,8.916 cw(c-14.118,8.916) -14.268,8.92 v1(-14.253,9.516) ; K12_K62_D2.2@-1.557,21.096 cw(c-3.064,19.589) -0.933,19.589 -0.933,18.253 cw(c-2.533,18.253) -0.941,18.087 cw(c-1.339,18.126) -0.942,18.084 -0.948,18.023 cw(c-1.346,18.065) -0.955,17.981 cw(c-1.346,18.065) -0.955,17.979 ccw(c1.559,17.425) -0.994,17.755 ccw(c0.195,17.599) -0.995,17.753 ccw(c-0.201,17.649) -0.995,17.752 ccw(c-0.598,17.7) -0.995,17.75 -1.082,17.07 ccw(c-0.685,17.019) -1.082,17.069 ; -1.102,16.691 -1.087,16.005 ; -1.102,16.692 cw(c0.898,16.733) -1.102,16.696 cw(c1.473,16.745) -1.082,17.065 cw(c0.506,16.868) -1.082,17.067 ; -1.087,16.002 ccw(c1.487,16.06) -1.052,15.631 ccw(c0.132,15.829) -1.051,15.629 ccw(c-0.657,15.694) -1.051,15.627 -0.994,15.291 ccw(c-0.599,15.356) -0.994,15.289 -0.936,14.951 ccw(c-0.542,15.019) -0.936,14.95 ; -0.935,14.947 ccw(c1.602,15.384) -0.847,14.591 ccw(c0.676,15.081) -0.846,14.586 ccw(c-0.465,14.707) -0.845,14.585 -0.832,14.544 ; -0.832,14.543 cw(c-0.975,14.498) -0.897,14.37 ccw(c-0.572,13.836) -0.759,13.24 cw(c-0.802,13.096) -0.652,13.096 -0.652,10.926 ccw(c-0.502,10.926) -0.631,10.849 -0.344,10.377 -0.337,10.365 cw(c-0.418,10.283) -0.303,10.283 v1(-0.303,8.683)
  Top Layer w0.25: K12_S1.2@-16.51,-33.02 -14.188,-33.02 ccw(c-14.188,-30.832) -12,-30.832 v1(-12,-30.25) ccw(c-12.75,-30.25) -12.75,-29.5 -14.939,-29.5 cw(c-14.939,-29.25) -15.115,-29.428 -15.264,-29.278 cw(c-14.732,-28.75) -15.267,-29.276 cw(c-14.912,-28.924) -15.269,-29.274 cw(c-14.732,-28.75) -15.27,-29.273 cw(c-14.912,-28.924) -15.272,-29.271 cw(c-14.732,-28.75) -15.29,-29.252 cw(c-14.919,-28.916) -15.294,-29.247 -15.589,-28.914 cw(c-15.214,-28.583) -15.59,-28.912 cw(c-14.653,-28.086) -15.726,-28.726 cw(c-15.298,-28.468) -15.728,-28.722 cw(c-15.299,-28.466) -15.729,-28.721 cw(c-13.97,-27.688) -15.737,-28.707 ; -15.972,-20.61 -15.903,-28.097 ccw(c-15.403,-28.092) -15.903,-28.101 ccw(c-14.653,-28.086) -15.738,-28.706 ; -15.972,-20.609 cw(c-15.722,-20.608) -15.948,-20.502 ccw(c-19.05,-19.05) -15.696,-19.743 ccw(c-19.05,-19.05) -15.657,-19.517 ccw(c-19.05,-19.05) -15.626,-18.974 -15.656,-17.598 -15.675,-16.744 cw(c-14.426,-16.716) -15.676,-16.716 -15.675,-15.68 cw(c-15.425,-15.68) -15.56,-15.469 ; -15.559,-15.469 ccw(c-16.51,-13.97) -15.465,-15.405 ccw(c-16.51,-13.97) -15.382,-12.6 cw(c-15.062,-12.215) -15.425,-12.56 -15.606,-12.369 cw(c-15.425,-12.196) -15.675,-12.196 -15.625,-0.014 ccw(c-19.05,0) -15.626,0.079 -15.675,2.208 cw(c-14.426,2.237) -15.676,2.234 -15.676,2.505 -15.675,2.801 cw(c-15.425,2.8) -15.533,3.026 ccw(c-16.51,5.08) -14.235,5.08 ccw(c-16.51,5.08) -14.254,5.371
  Bottom Layer w0.15: v1(-14.253,9.516) -13.656,9.678 ; -13.655,9.678 -13.412,9.742 -2.942,9.742 cw(c-2.942,8.664) -2.619,9.693 cw(c-2.664,9.55) -2.576,9.671 -2.001,9.255 ccw(c-0.62,10.635) -0.62,8.683 v1(-0.303,8.683)
  Bottom Layer w0.25: v1(-12,-30.25) K12_D1.2@-12,-28.7
NetK12_K62_D2_1: K12_K62_D2.1 K12_K62_R1.2 | length 1.7
  Top Layer w0.15: K12_K62_D2.1@-0.691,21.596 -0.637,21.542 -0.637,21.058 -0.531,20.952 v1(-0.531,20.831)
  Bottom Layer w0.15: K12_K62_R1.2@-0.691,21.596 -0.637,21.542 -0.637,21.058 -0.531,20.952 v1(-0.531,20.831)
NetK13_D1_2: K13_D1.2 K13_K62_D2.2 K13_S1.2 | length 100.8
  Top Layer w0.15: -13.76,4.708 -13.76,5.468 -13.76,9.084 cw(c-13.61,9.084) -13.735,9.168 ccw(c-14.253,9.516) -13.735,9.865 cw(c-13.61,9.949) -13.76,9.949 v1(-13.76,13.244) ; v1(-5.506,13.167) K13_K62_D2.2@-5.506,20.11
  Top Layer w0.25: K13_S1.2@-16.51,-52.07 -16.51,-35.028 cw(c-16.26,-35.03) -16.291,-34.781 ccw(c-16.51,-33.02) -15.291,-34.31 ccw(c-16.51,-33.02) -14.861,-33.677 cw(c-14.629,-33.77) -14.629,-33.52 -14.188,-33.52 ccw(c-14.188,-30.832) -11.5,-30.883 cw(c-11.251,-30.889) -11.391,-30.682 cw(c-9.973,-32.79) -9.973,-30.25 v1(-9,-30.25) -9,-29.25 ccw(c-9.25,-29.25) -9.25,-29 -14.732,-29 cw(c-14.732,-28.75) -14.912,-28.924 cw(c-14.732,-28.75) -14.919,-28.916 -15.214,-28.583 cw(c-14.653,-28.086) -15.298,-28.468 cw(c-14.868,-28.212) -15.299,-28.466 cw(c-13.97,-27.688) -15.303,-28.459 cw(c-14.869,-28.211) -15.304,-28.457 cw(c-14.653,-28.086) -15.403,-28.092 -15.462,-21.6 -15.462,-21.279 cw(c-14.406,-21.279) -14.458,-20.223 ; -14.457,-20.223 cw(c-14.447,-20.473) -14.374,-20.234 -14.337,-20.245 ccw(c-13.97,-19.05) -13.973,-17.8 -14.026,-17.8 cw(c-14.026,-17.3) -14.029,-17.8 cw(c-14.026,-17.05) -14.506,-17.626 -14.908,-17.291 cw(c-14.587,-16.908) -14.914,-17.286 cw(c-14.426,-16.716) -14.956,-17.246 cw(c-14.426,-16.716) -15.176,-16.714 -15.175,-15.934 cw(c-14.925,-15.936) -15.083,-15.742 ccw(c-16.51,-13.97) -14.964,-15.639 ccw(c-16.51,-13.97) -15.062,-12.215 -15.062,-1.285 cw(c-14.812,-1.285) -14.724,-1.051 -14.413,-1.169 ccw(c-13.97,0) -13.598,1.193 -13.677,1.218 -14.649,1.521 cw(c-14.5,1.999) -14.651,1.522 cw(c-14.426,2.237) -15.176,2.235 -15.176,2.504 cw(c-14.926,2.503) -15.056,2.716 ccw(c-16.51,5.08) -13.76,4.708
  Bottom Layer w0.15: v1(-13.76,13.244) -13.722,13.206 -5.544,13.206 v1(-5.506,13.167)
  Bottom Layer w0.25: v1(-9,-30.25) K13_D1.2@-9,-28.7
NetK13_K62_D2_1: K13_K62_D2.1 K13_K62_R1.2 | length 1.3
  Top Layer w0.15: K13_K62_D2.1@-4.511,20.013 -4.491,20.187 v1(-4.444,20.671)
  Bottom Layer w0.15: K13_K62_R1.2@-4.511,20.013 -4.491,20.187 v1(-4.444,20.671)
NetK14_D1_2: K14_D1.2 K14_K62_D2.2 K14_S1.2 | length 155.3
  Top Layer w0.15: -16.51,-67.191 -16.51,-60.675 ; -13.244,5.322 -13.244,5.4 ccw(c-13.394,5.4) -13.245,5.414 -13.36,6.645 -13.36,8.976 cw(c-13.21,8.976) -13.343,9.045 ccw(c-14.253,9.516) -13.343,9.988 cw(c-13.21,10.057) -13.36,10.057 -13.36,12.698 cw(c-13.21,12.698) -13.317,12.804 ccw(c-13.76,13.244) -13.136,13.206 ccw(c-13.76,13.244) -13.675,13.863 cw(c-13.653,14.012) -13.803,14.011 -13.803,15.424 cw(c-12.943,16.285) -14.16,16.285 -14.16,25.758 cw(c-11.62,25.758) -13.919,26.837 v1(-12.99,28.818) ; v1(-12.113,31.529) ccw(c-12.113,32.651) -11.319,31.858 -9.964,33.213 -9.832,33.518 cw(c-8.524,32.951) -8.686,34.366 -6.685,34.596 cw(c-6.621,34.05) -6.621,34.6 -5.129,34.6 cw(c-5.129,34.2) -5.064,34.595 -4.559,34.512 cw(c-4.647,33.969) -4.555,34.511 -4.145,34.444 -3.581,34.352 -2.764,34.219 cw(c-2.853,33.676) -2.739,34.214 cw(c-2.821,33.823) -2.736,34.214 -1.959,34.046 cw(c-2.076,33.509) -1.93,34.039 cw(c-2.076,33.509) -1.908,34.032 cw(c-2.03,33.651) -1.905,34.032 -1.814,34.002 -1.447,33.883 -1.355,33.853 cw(c-1.525,33.331) -1.328,33.844 -0.98,33.71 cw(c-1.034,33.57) -0.976,33.708 -0.974,33.708 -0.443,33.475 cw(c-0.503,33.337) -0.43,33.468 0.255,33.081 cw(c0.182,32.951) 0.268,33.073 0.289,33.058 0.718,32.756 cw(c0.631,32.633) 0.781,32.633 K14_K62_D2.2@0.781,31.176
  Top Layer w0.25: -14.385,-17.076 -14.185,-17.243 ccw(c-14.026,-17.05) -14.026,-17.3 -13.971,-17.3 cw(c-13.97,-19.05) -12.513,-20.02 cw(c-13.97,-19.05) -13.451,-20.721 cw(c-13.97,-19.05) -14.198,-20.785 cw(c-13.97,-19.05) -14.356,-20.757 ccw(c-14.411,-21.001) -14.54,-20.787 ccw(c-14.185,-21.372) -14.869,-21.372 -14.869,-27.217 ccw(c-13.751,-27.217) -13.751,-28.336 -6.728,-28.336 cw(c-6.728,-29.063) -6,-29.063 v1(-6,-30.25) -8.111,-30.25 ccw(c-8.109,-30.5) -8.35,-30.431 cw(c-9,-30.25) -9.396,-30.797 ccw(c-9.541,-31) -9.54,-30.75 -9.973,-30.75 ccw(c-9.973,-32.79) -10.587,-30.845 ccw(c-10.511,-31.083) -10.679,-30.897 ccw(c-9,-32.75) -10.997,-31.245 ccw(c-10.796,-31.394) -11.043,-31.352 cw(c-14.188,-30.832) -14.188,-34.02 -14.316,-34.02 ccw(c-14.316,-34.27) -14.533,-34.146 cw(c-16.51,-33.02) -15.382,-34.996 cw(c-16.51,-33.02) -15.835,-35.193 ccw(c-15.76,-35.431) -16.01,-35.43 -16.01,-43.549 -16.01,-50.19 ccw(c-15.76,-50.189) -15.854,-50.421 cw(c-16.51,-52.07) -16.291,-53.831 ccw(c-16.26,-54.08) -16.51,-54.078 -16.51,-67.205 ccw(c-13.97,-67.205) -15.766,-69.001 K14_S1.2@-11.742,-73.026 ; -14.386,-17.075 -14.586,-16.908 ccw(c-14.911,-17.288) -14.587,-16.907 cw(c-14.426,-16.716) -14.676,-16.715 -14.675,-16.161 cw(c-14.425,-16.162) -14.598,-15.981 ccw(c-16.51,-13.97) -14.561,-15.945 ccw(c-16.51,-13.97) -14.096,-12.601 -14.562,-11.776 -14.562,-1.969 cw(c-14.312,-1.97) -14.27,-1.724 ccw(c-13.97,0) -12.597,1.085 ccw(c-13.97,0) -13.449,1.671 -14.5,1.999 cw(c-14.426,2.237) -14.573,2.439 ccw(c-16.51,5.08) -13.244,5.322
  Bottom Layer w0.15: v1(-12.99,28.818) -12.857,28.951 ccw(c-14.653,30.747) -12.113,30.747 v1(-12.113,31.529)
  Bottom Layer w0.25: v1(-6,-30.25) K14_D1.2@-6,-28.7
NetK14_K62_D2_1: K14_K62_D2.1 K14_K62_R1.2 | length 1.3
  Top Layer w0.15: v1(-0.376,31.341) 0.024,31.742 K14_K62_D2.1@0.024,31.829
  Bottom Layer w0.15: v1(-0.376,31.341) 0.024,31.742 K14_K62_R1.2@0.024,31.829
NetK20_D1_2: K20_D1.2 K20_K62_D2.2 K20_S1.2 | length 111.3
  Top Layer w0.15: K20_S1.2@-35.56,5.08 -33.223,7.417 ccw(c-33.805,8) -32.981,8 -32.981,9.247 ccw(c-33.423,9.247) -33.111,9.559 -33.108,9.555 cw(c-32.356,10.307) -33.42,10.307 -33.42,12.98 cw(c-31.861,12.98) -33.316,13.541 ccw(c-33.456,13.595) -33.306,13.595 -33.306,13.719 ; -33.306,13.72 ccw(c-33.456,13.718) -33.321,13.786 -33.333,13.808 cw(c-32.774,14.088) -33.333,14.367 -33.321,14.39 ccw(c-33.456,14.457) -33.306,14.456 v1(-33.306,17.967) ; v1(-18.09,19.167) -17.528,20.085 ccw(c-17.656,20.163) -17.527,20.087 -17.51,20.115 -17.089,20.803 ccw(c-17.217,20.881) -17.074,20.835 ccw(c-18.829,21.385) -16.991,21.332 -16.99,21.462 ; -16.99,21.463 -16.99,21.657 ; -16.99,21.66 -16.964,25.77 cw(c-11.62,25.758) -16.691,27.445 cw(c-15.928,27.192) -16.69,27.447 -16.292,28.641 -15.895,29.836 ; -15.894,29.836 cw(c-13.112,28.91) -15.892,29.844 cw(c-15.129,29.589) -15.891,29.848 cw(c-13.112,28.91) -13.557,31.808 cw(c-13.112,28.91) -13.206,31.841 -13.191,31.841 ccw(c-13.197,31.991) -13.06,31.932 cw(c-12.113,31.529) -11.804,32.511 -10.641,33.673 -10.569,33.838 cw(c-9.832,33.518) -10.569,33.839 cw(c-8.524,32.951) -8.775,35.165 -6.779,35.395 cw(c-6.621,34.05) -6.621,35.404 -5.129,35.404 cw(c-5.129,34.2) -4.932,35.388 -4.432,35.306 cw(c-4.647,33.969) -4.426,35.305 -3.191,35.103 -2.636,35.013 cw(c-2.853,33.676) -2.575,35.001 ; -2.574,35.001 cw(c-2.739,34.214) -2.572,35.001 cw(c-2.821,33.823) -2.568,35 -1.788,34.832 ; -1.787,34.832 cw(c-2.076,33.509) -1.718,34.814 cw(c-1.822,34.426) -1.713,34.813 cw(c-1.821,34.426) -1.711,34.812 cw(c-2.076,33.509) -1.664,34.798 ; -1.663,34.798 cw(c-2.03,33.651) -1.659,34.797 -1.382,34.707 -1.108,34.619 cw(c-1.355,33.853) -1.104,34.617 ; -1.103,34.617 cw(c-1.525,33.331) -1.042,34.595 ; -1.041,34.595 -0.989,34.575 -0.692,34.461 cw(c-1.034,33.57) -0.663,34.449 ; -0.663,34.449 cw(c-0.976,33.708) -0.659,34.448 cw(c-0.817,34.078) -0.658,34.447 cw(c-0.974,33.708) -0.651,34.444 -0.171,34.233 -0.122,34.212 cw(c-0.503,33.337) -0.039,34.171 cw(c-0.234,33.819) -0.036,34.169 cw(c-0.43,33.468) -0.032,34.167 0.651,33.781 cw(c0.182,32.951) 0.733,33.729 1.064,33.495 1.182,33.412 ; K20_K62_D2.2@0.401,27.395 1.764,27.395 ccw(c1.764,29.935) 3.56,28.139 4.308,28.887 ccw(c4.202,28.992) 4.343,29.044 4.299,29.163 4.074,29.775 ccw(c3.934,29.723) 4.068,29.788 4.043,29.842 3.907,30.12 3.789,30.363 ccw(c3.288,30.121) 3.751,30.429 2.712,31.989 ccw(c2.378,31.766) 2.671,32.041 2.409,32.32 2.085,32.664 ccw(c1.976,32.561) 2.074,32.675 1.798,32.915 1.543,33.136 1.455,33.212 1.437,33.228 ccw(c1.173,32.925) 1.434,33.231 ccw(c1.072,32.808) 1.394,33.262 1.183,33.412
  Top Layer w0.25: K20_S1.2@-35.56,5.08 -35.56,-11.96 cw(c-35.81,-11.96) -35.779,-12.209 ccw(c-35.56,-13.97) -36.217,-15.619 cw(c-36.31,-15.851) -36.06,-15.851 -36.06,-17.337 ccw(c-35.56,-17.337) -36.06,-17.339 ccw(c-34.81,-17.335) -36.006,-17.698 -35.915,-17.998 cw(c-38.1,-19.05) -35.97,-20.209 ccw(c-35.75,-20.328) -36,-20.327 -36,-27.71 ccw(c-33.46,-27.71) -35.981,-28.023 -35.98,-28.024 ccw(c-35.733,-27.992) -35.774,-28.238 cw(c-35.978,-29.506) -34.694,-29.506 -34.694,-29.779 ccw(c-34.444,-29.778) -34.553,-30.003 -34.551,-30.004 ccw(c-33.46,-27.71) -33.46,-30.25 v1(-33,-30.25)
  Bottom Layer w0.15: v1(-33.306,17.967) -29.229,17.967 ccw(c-29.23,18.117) -29.145,17.993 cw(c-28.34,16.818) -28.466,18.237 -27.843,18.293 -27.22,18.349 cw(c-26.957,15.417) -26.957,18.36 -26.631,18.36 ccw(c-26.631,18.51) -26.482,18.519 cw(c-25.858,18.556) -25.66,19.148 ccw(c-25.613,19.291) -25.609,19.141 -24.776,19.166 cw(c-24.698,16.627) -24.77,19.166 -23.07,19.217 cw(c-23.05,18.592) -22.828,19.177 ccw(c-22.776,19.317) -22.777,19.167 v1(-18.09,19.167)
  Bottom Layer w0.25: v1(-33,-30.25) K20_D1.2@-33,-28.7
NetK20_K62_D2_1: K20_K62_D2.1 K20_K62_R1.2 | length 1.9
  Top Layer w0.2: v1@0.046,29.264 0.034,29.252 0.034,28.359 K20_K62_D2.1@0.059,28.334
  Bottom Layer w0.2: v1(0.027,29.253) 0.034,29.246 0.034,28.359 K20_K62_R1.2@0.059,28.334
NetK21_D1_2: K21_D1.2 K21_K62_D2.2 K21_S1.2 | length 95.7
  Top Layer w0.15: -34.56,3.613 -34.093,4.08 -33.314,4.86 ccw(c-35.11,6.656) -32.57,6.656 -32.57,9.748 ccw(c-33.295,9.748) -32.782,10.261 -32.901,10.379 cw(c-32.614,10.666) -33.02,10.666 -33.02,12.98 cw(c-31.861,12.98) -32.903,13.488 cw(c-31.861,12.98) -32.902,13.489 ccw(c-33.037,13.554) -32.891,13.524 v1(-32.774,14.088) ; -2.917,20.602 cw(c-1.942,21.162) -3.043,20.933 cw(c-1.942,21.162) -3.061,21.273 cw(c-1.942,21.162) -2.508,22.135 -2.163,22.336 ccw(c-2.239,22.465) -2.089,22.465 -2.089,23.22 ccw(c-2.239,23.219) -2.118,23.308 cw(c-1.535,23.739) -2.193,24.041 -2.089,24.269 -2.038,24.401 ccw(c-2.178,24.455) -2.028,24.455 K21_K62_D2.2@-2.028,25.8 ; -2.916,20.6 cw(c-2.57,20.8) -2.917,20.602 ; -2.916,20.599 ccw(c-2.569,20.798) -2.915,20.598 -2.611,20.067 cw(c-2.741,19.993) -2.595,20.028 cw(c-3.772,19.743) -2.561,19.743 -2.561,15.191 cw(c-2.711,15.192) -2.568,15.146 ccw(c-1.975,14.948) -2.568,14.749 -2.561,14.729 v1(-2.395,14.209)
  Top Layer w0.25: K21_S1.2@-35.56,-13.97 -35.56,-17.337 ccw(c-34.81,-17.335) -35.527,-17.554 -35.452,-17.802 ccw(c-35.213,-17.728) -35.441,-17.831 cw(c-38.1,-19.05) -35.475,-20.34 ccw(c-35.25,-20.449) -35.5,-20.448 -35.5,-27.607 ccw(c-35.25,-27.607) -35.34,-27.84 cw(c-35.978,-29.506) -34.217,-29.218 ccw(c-33.971,-29.178) -33.971,-29.428 -30.822,-29.428 cw(c-30.822,-30.25) v1(-30,-30.25) ; K21_S1.2@-35.014,-13.97 -35.014,3.219 cw(c-34.764,3.218) -34.863,3.447 ccw(c-35.56,5.08) -34.56,3.613 ccw(c-35.56,5.08) -34.093,4.08
  Bottom Layer w0.15: v1(-32.774,14.088) -31.628,13.995 ccw(c-31.616,14.145) -31.616,13.995 -31.608,13.995 cw(c-31.608,12.742) -30.891,13.769 ccw(c-30.805,13.892) -30.805,13.742 -29.296,13.742 ccw(c-29.296,13.892) -29.16,13.831 cw(c-28.593,13.567) -28.585,14.192 ccw(c-28.584,14.342) -28.584,14.192 cw(c-28.576,13.567) -28.254,14.103 -28.253,14.102 cw(c-28.332,13.975) -28.217,14.071 ; -28.216,14.07 ccw(c-28.101,14.167) -28.197,14.051 cw(c-28.593,13.567) -28.1,13.951 ccw(c-27.982,14.045) -28.075,13.927 ; -28.075,13.926 cw(c-28.167,13.808) -28.038,13.885 ; -28.038,13.884 cw(c-28.576,13.567) -28.008,13.828 ccw(c-27.873,13.892) -27.873,13.742 -15.095,13.742 cw(c-13.76,13.244) -12.97,14.43 ccw(c-12.888,14.556) -12.889,14.406 -7.086,14.406 -5.686,14.581 cw(c-5.506,13.167) -4.574,14.245 ccw(c-4.476,14.359) -4.477,14.209 v1(-2.395,14.209)
  Bottom Layer w0.25: v1(-30,-30.25) K21_D1.2@-30,-28.7
NetK21_K62_D2_1: K21_K62_D2.1 K21_K62_R1.2 | length 1.8
  Top Layer w0.2: K21_K62_D2.1@-1.967,26.798 -1.922,26.844 -1.922,27.719 v1@-1.926,27.724
  Bottom Layer w0.2: K21_K62_R1.2@-1.967,26.798 -1.921,26.844 -1.921,27.608 v1(-1.879,27.65)
NetK22_D1_2: K22_D1.2 K22_K62_D2.2 K22_S1.2 | length 107.6
  Top Layer w0.15: -34.514,2.914 -33.859,3.569 -32.914,4.514 ccw(c-34.71,6.31) -32.17,6.31 -32.17,10.362 ccw(c-33.556,10.362) -32.224,10.745 v1(-32.395,11.342) ; 0.113,16.029 ccw(c1.487,16.06) 0.132,15.83 ; 0.113,16.031 0.098,16.716 cw(c0.898,16.733) 0.098,16.718 cw(c1.473,16.745) 0.109,16.917 cw(c0.506,16.868) 0.109,16.919 0.195,17.599 cw(c0.592,17.548) 0.196,17.6 cw(c1.559,17.425) 0.236,17.798 0.421,18.458 cw(c0.806,18.349) 0.422,18.459 ; 0.132,15.829 0.226,15.278 0.247,15.151 ccw(c1.602,15.384) 0.295,14.958 ccw(c0.676,15.08) 0.296,14.956 0.509,14.304 ccw(c0.889,14.429) 0.509,14.302 ccw(c1.816,14.732) 0.585,14.12 ccw(c1.301,14.475) 0.585,14.118 ccw(c0.944,14.296) 0.586,14.117 0.893,13.504 ccw(c1.25,13.683) 0.894,13.502 ccw(c1.608,13.861) 0.894,13.501 ccw(c2.122,14.119) 0.923,13.447 cw(c0.379,13.138) 0.817,12.692 0.578,12.458 ccw(c0.683,12.351) 0.533,12.351 0.533,12.075 cw(c-0.185,12.075) v1(0.323,11.567) ; 0.422,18.46 cw(c1.745,18.085) 0.49,18.647 cw(c0.855,18.484) 0.491,18.648 0.631,18.961 0.771,19.274 ; 0.772,19.276 cw(c2.026,18.711) 0.867,19.451 ; 0.868,19.452 1.049,19.735 ccw(c0.585,20.031) 1.058,19.751 2.255,21.777 K22_K62_D2.2@2.364,21.974
  Top Layer w0.25: K22_S1.2@-35.56,-33.02 -33.382,-33.02 ccw(c-33.382,-32.77) -33.355,-33.018 cw(c-33.02,-36.04) -33.02,-33 -29.237,-33 ccw(c-29.238,-32.75) -29.207,-32.998 -29.205,-32.998 ccw(c-29.54,-30.48) -27,-30.48 v1(-27,-30.25) ccw(c-28.326,-30.25) -28.326,-28.924 -33.584,-28.924 cw(c-33.584,-28.674) -33.82,-28.756 ccw(c-35.978,-29.506) -34.872,-27.508 cw(c-34.75,-27.289) -35,-27.289 -35,-20.56 cw(c-34.75,-20.561) -34.978,-20.459 ccw(c-38.1,-19.05) -34.973,-17.653 cw(c-34.744,-17.552) -34.983,-17.626 -35.049,-17.41 cw(c-34.81,-17.335) -35.049,-17.407 cw(c-34.81,-17.335) -35.06,-17.335 -35.06,-15.984 cw(c-34.81,-15.985) -34.838,-15.736 ccw(c-35.014,-13.97) -34.835,-15.736 ccw(c-35.014,-13.97) -34.358,-12.321 cw(c-34.264,-12.089) -34.514,-12.09 -34.514,2.914 cw(c-34.264,2.913) -34.393,3.127 ccw(c-35.56,5.08) -33.859,3.569
  Bottom Layer w0.15: v1(-32.395,11.342) -28.872,11.342 cw(c-28.872,11.192) -28.854,11.341 ccw(c-28.593,13.551) -28.331,11.341 cw(c-28.314,11.192) -28.314,11.342 -0.22,11.342 ccw(c-0.22,12.11) v1(0.323,11.567)
  Bottom Layer w0.25: v1(-27,-30.25) K22_D1.2@-27,-28.7
NetK22_K62_D2_1: K22_K62_D2.1 K22_K62_R1.2 | length 1.6
  Top Layer w0.15: v1(2.256,23.267) cw(c2.347,23.148) 2.453,23.254 2.745,22.963 K22_K62_D2.1@2.873,22.835
  Bottom Layer w0.15: v1(2.256,23.267) 2.558,22.965 ccw(c2.873,23.28) K22_K62_R1.2@2.873,22.835
NetK23_D1_2: K23_D1.2 K23_K62_D2.2 K23_S1.2 | length 140.6
  Top Layer w0.15: v1(-32.044,12.142) cw(c-32.705,11.481) -31.77,11.481 -31.77,0 ; v1(1.976,11.567) 1.976,12.385 ccw(c1.826,12.385) 1.973,12.414 1.778,13.412 ccw(c0.379,13.138) 1.622,13.836 cw(c2.122,14.119) 1.608,13.861 1.301,14.475 cw(c1.816,14.732) 1.269,14.553 1.056,15.205 cw(c1.602,15.384) 1.036,15.287 0.973,15.656 0.921,15.963 cw(c1.487,16.06) 0.912,16.047 0.898,16.733 cw(c1.473,16.745) 0.902,16.818 0.989,17.498 cw(c1.559,17.425) 1.006,17.581 1.192,18.241 cw(c1.745,18.085) 1.22,18.321 1.348,18.605 1.501,18.946 cw(c2.026,18.711) 1.541,19.021 1.911,19.598 cw(c2.395,19.289) 1.935,19.633 3.011,21.069 ccw(c2.891,21.159) 3.015,21.074 3.47,21.743 ccw(c3.346,21.827) 3.477,21.755 3.717,22.188 ccw(c3.585,22.26) 3.725,22.206 3.917,22.705 ccw(c3.241,22.966) 3.774,23.457 cw(c3.885,23.558) 3.735,23.557 K23_K62_D2.2@3.735,25.945
  Top Layer w0.25: K23_S1.2@-35.56,-52.07 -35.56,-38.919 cw(c-35.31,-38.921) -35.548,-38.845 ccw(c-37.856,-38.1) -35.548,-37.355 -35.556,-37.283 cw(c-34.81,-37.204) -35.56,-37.208 cw(c-35.06,-37.205) -35.56,-37.205 -35.56,-36.04 cw(c-33.02,-36.04) -35.308,-34.936 cw(c-35.082,-35.044) -35.194,-34.82 -34.822,-34.635 cw(c-34.599,-35.082) -34.811,-34.629 ccw(c-35.56,-33.02) -34.318,-34.288 -33.742,-33.725 cw(c-33.217,-34.261) -33.334,-33.52 cw(c-33.256,-34.014) -33.332,-33.52 -33.326,-33.519 cw(c-33.25,-34.013) -33.303,-33.516 ccw(c-33.355,-33.018) -33.301,-33.516 cw(c-33.02,-36.04) -33.02,-33.5 -26.54,-33.5 ccw(c-26.54,-30.96) -24,-30.96 v1(-24,-30.25) -24,-29.838 ccw(c-25.255,-29.838) -24.643,-28.742 ccw(c-24.764,-28.961) -24.763,-28.711 -27.147,-28.711 cw(c-27.145,-27.961) -27.484,-28.629 cw(c-27.259,-28.183) -27.487,-28.628 ccw(c-28.326,-30.25) -28.326,-28.424 -33.252,-28.424 cw(c-33.252,-28.174) -33.476,-28.284 ccw(c-35.978,-29.506) -34.393,-27.217 cw(c-34.25,-27.012) -34.5,-27.012 -34.5,-22.076 -34.5,-21.986 cw(c-32.884,-21.985) -34.5,-21.982 -34.5,-21.777 -34.448,-21.577 cw(c-32.884,-21.985) -33.46,-20.475 cw(c-33.283,-20.943) -33.421,-20.462 -33.346,-20.441 -32.681,-20.253 ccw(c-33.02,-19.05) -32.756,-17.828 -33.97,-17.562 cw(c-33.863,-17.074) -33.973,-17.562 cw(c-33.81,-16.83) -34.286,-17.409 -34.381,-17.331 ccw(c-35.493,-18.682) -34.415,-17.304 ccw(c-34.724,-17.697) -34.417,-17.302 ccw(c-35.032,-18.09) -34.419,-17.3 ; -34.42,-17.3 ccw(c-36.06,-19.418) -34.46,-17.269 cw(c-34.31,-17.069) -34.56,-17.069 -34.56,-16.743 -34.56,-16.394 cw(c-34.31,-16.395) -34.381,-16.155 -34.38,-16.155 ccw(c-35.014,-13.97) -33.889,-11.993 cw(c-33.764,-11.776) -34.014,-11.777 -34.014,-1.301 cw(c-33.764,-1.302) -33.641,-1.085 ccw(c-33.02,0) -31.77,0
  Bottom Layer w0.15: v1(-32.044,12.142) ccw(c-31.078,13.108) -31.078,11.742 -28.847,11.742 cw(c-28.847,11.592) -28.828,11.741 ccw(c-28.593,13.551) -28.357,11.741 cw(c-28.338,11.592) -28.338,11.742 -2.028,11.742 -1.153,11.742 -0.888,11.742 ccw(c-0.888,11.892) -0.829,11.754 0.073,12.14 cw(c0.323,11.567) 0.936,11.687 ccw(c1.083,11.717) 1.082,11.567 v1(1.976,11.567)
  Bottom Layer w0.25: v1(-24,-30.25) K23_D1.2@-24,-28.7
NetK23_K62_D2_1: K23_K62_D2.1 K23_K62_R1.2 | length 1.3
  Top Layer w0.15: v1(3.088,26.943) 3.552,26.946 K23_K62_D2.1@3.727,26.945
  Bottom Layer w0.15: v1(3.088,26.943) 3.552,26.946 K23_K62_R1.2@3.727,26.945